# EAGLE board SETBOARD (EAGLE 7.4.0)
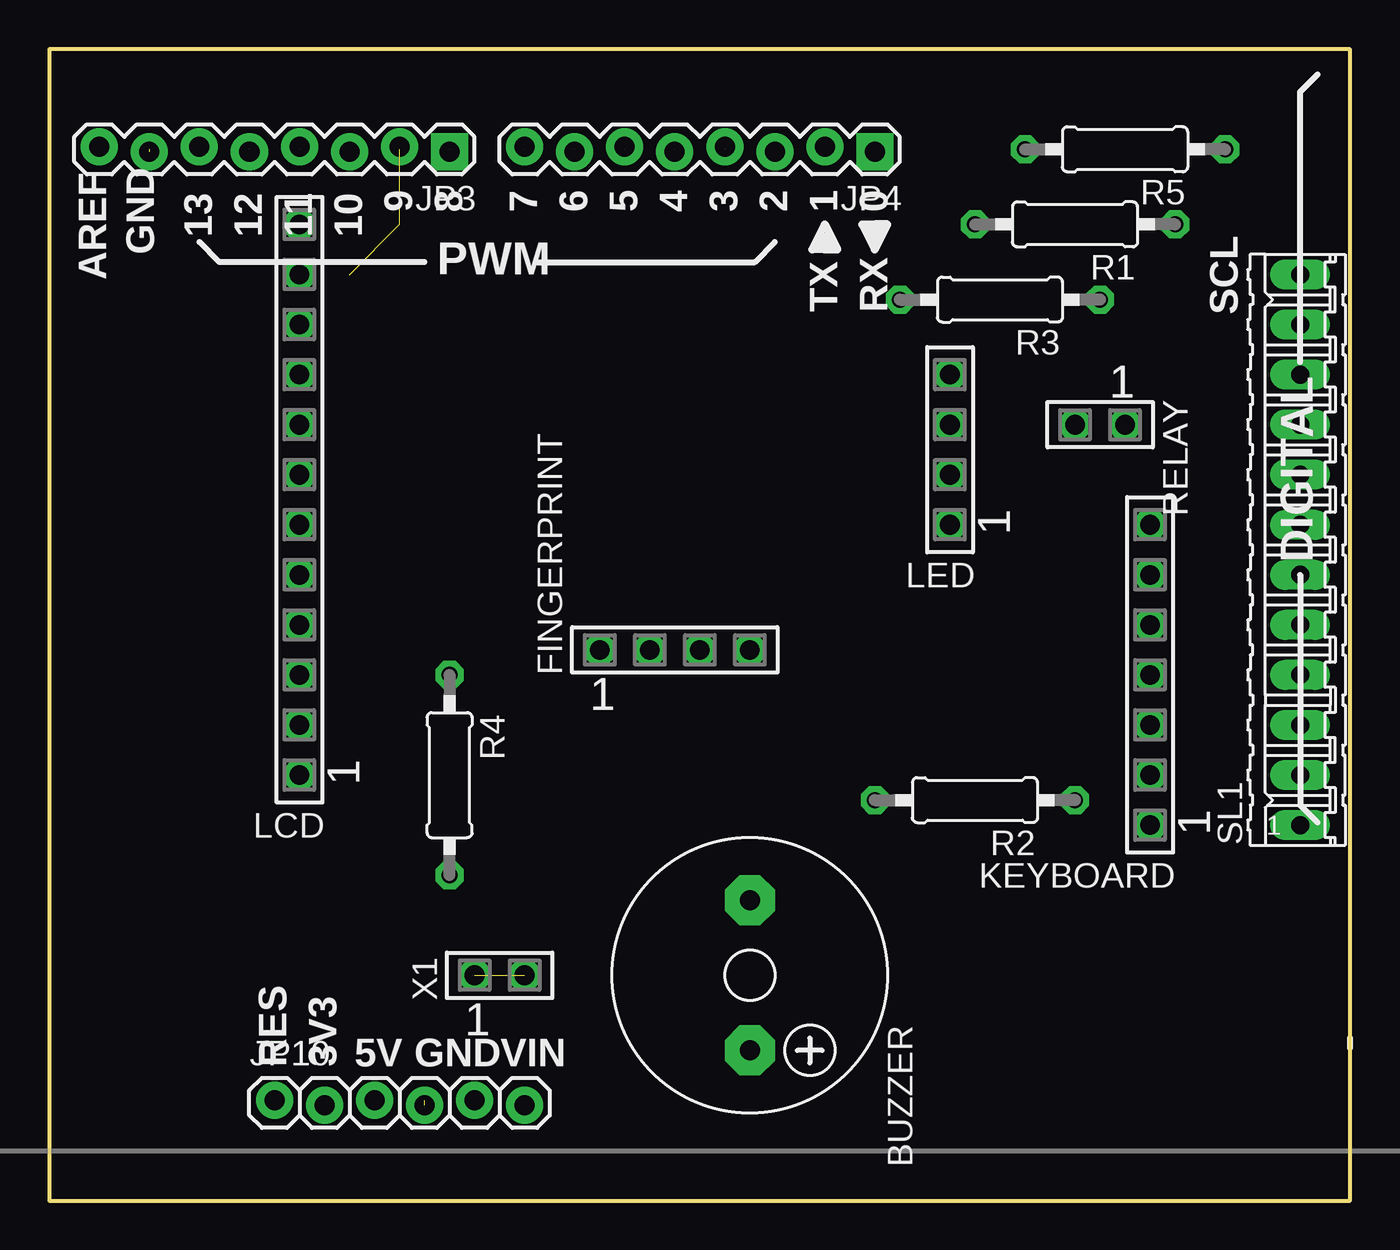
[diagram p0: board, top side]
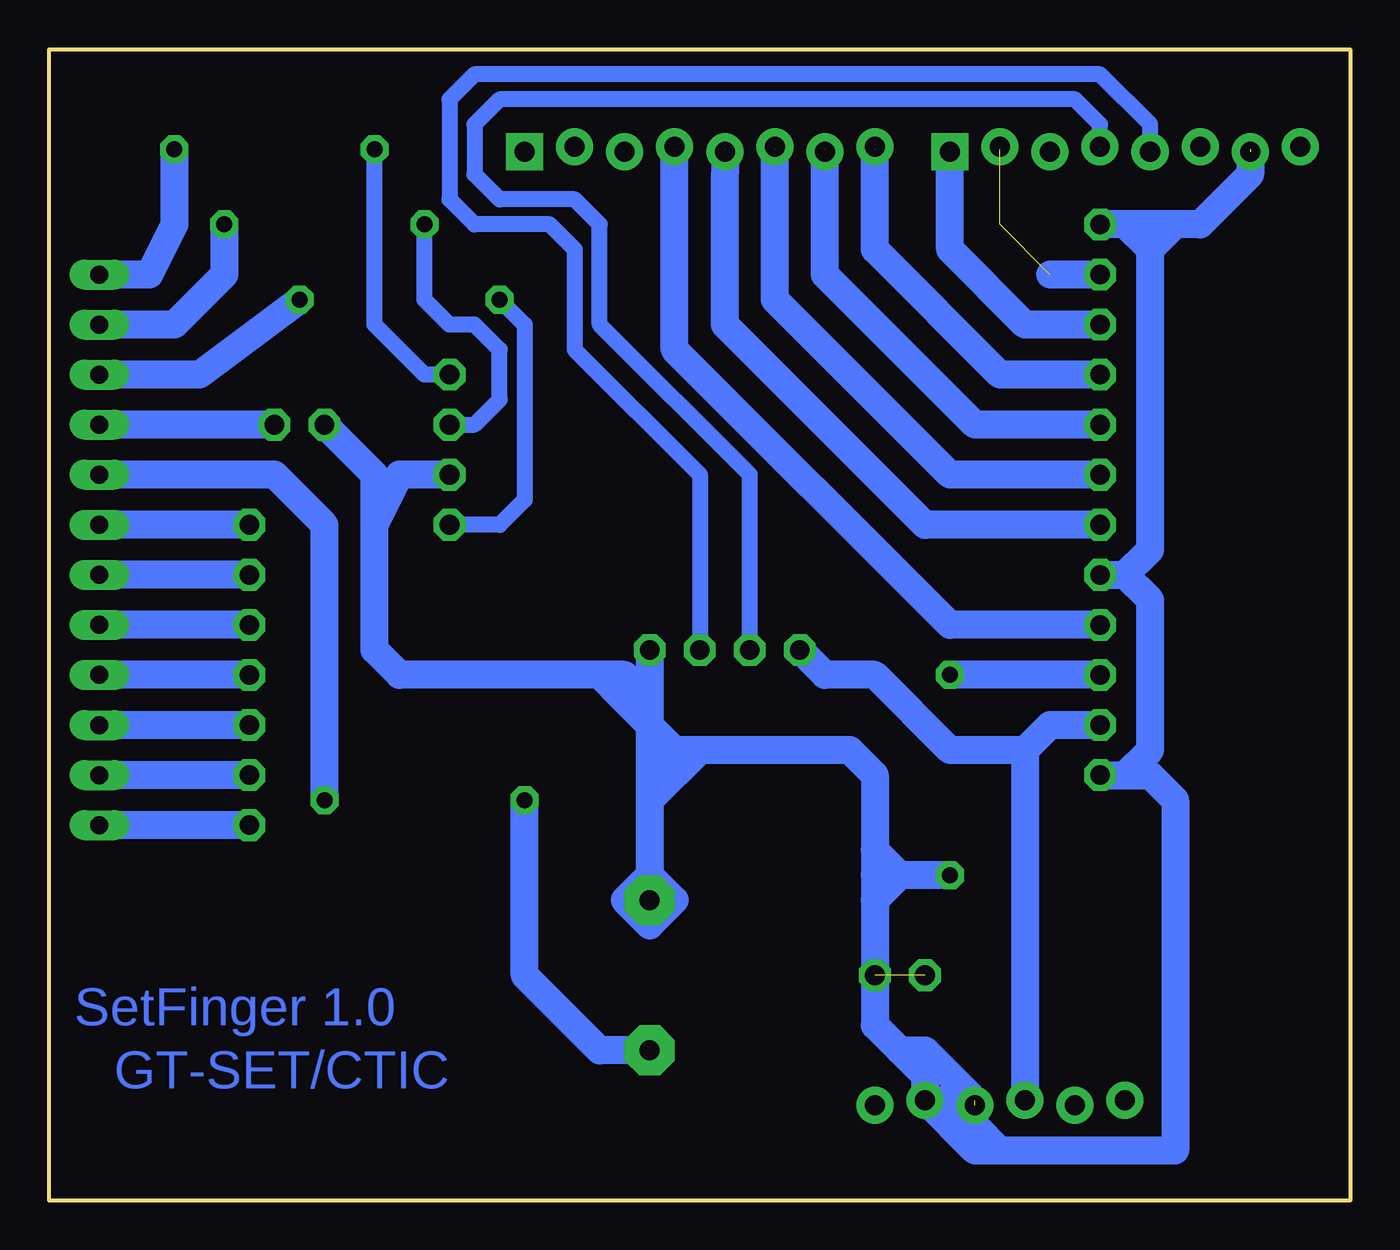
[diagram p1: board, bottom side, seen from below]

Size 66.04 x 58.42 mm. Coordinates in mm from the lower left corner, seen from the top.
Outline: 0,0 66.04,0 66.04,58.42 0,58.42 0,0
Copper layers (1*16): Top 0.035mm / dielectric 1.5mm / Bottom 0.035mm
Design rules "SparkFun": minimum track width 8mil, minimum drill 20mil, track to track 8mil, track to pad 8mil, pad to pad 8mil, via to via 8mil, smd to smd 8mil, copper to edge 10mil, drill to drill 8mil, minimum pad ring 12mil, minimum via ring 10mil, stop-mask expansion 4mil, vias tented up to drill 25mil, thermal gap 10mil

## Footprints (pad centres in the part's own frame; a part is rotated, then mirrored left to right if it is on the bottom)
F/CM12P = drill 1.016 pad 2.54 octagon: + 3.81,0; - -3.81,0
SSW-104-02-S-S = drill 1 pad 1.5 octagon: 1 -3.81,0; 2 -1.27,0; 3 1.27,0; 4 3.81,0
1X08_LOCK = drill 1.016 pad 1.88 square: 1 0,0.127 | drill 1.016 pad 1.88: 2 2.54,-0.127; 3 5.08,0.127; 4 7.62,-0.127; 5 10.16,0.127; 6 12.7,-0.127; 7 15.24,0.127; 8 17.78,-0.127
1X06_LOCK = drill 1.016 pad 1.88: 1 0,0; 2 2.54,-0.254; 3 5.08,0; 4 7.62,-0.254; 5 10.16,0; 6 12.7,-0.254
SSW-107-02-S-S = drill 1 pad 1.5 octagon: 1 -7.62,0; 2 -5.08,0; 3 -2.54,0; 4 0,0; 5 2.54,0; 6 5.08,0; 7 7.62,0
SSW-112-02-S-S = drill 1 pad 1.5 octagon: 1 -13.97,0; 2 -11.43,0; 3 -8.89,0; 4 -6.35,0; 5 -3.81,0; 6 -1.27,0; 7 1.27,0; 8 3.81,0; 9 6.35,0; 10 8.89,0; 11 11.43,0; 12 13.97,0
0207/10 = drill 0.813 octagon: 1 -5.08,0; 2 5.08,0
SSW-102-02-S-S = drill 1 pad 1.5 octagon: 1 -1.27,0; 2 1.27,0
12P = drill 0.914 long: 1 -13.97,0; 2 -11.43,0; 3 -8.89,0; 4 -6.35,0; 5 -3.81,0; 6 -1.27,0; 7 1.27,0; 8 3.81,0; 9 6.35,0; 10 8.89,0; 11 11.43,0; 12 13.97,0

## Placement (x,y rotation side)
BUZZER  BUZZER  [F/CM12P]  35.56,11.43 270 top
FINGERPRINT  BIOMETRIC  [SSW-104-02-S-S]  31.75,27.94 0 top
JP3  [1X08_LOCK]  20.32,53.34 180 top
JP4  [1X08_LOCK]  41.91,53.34 180 top
JP10  [1X06_LOCK]  11.43,5.08 0 top
KEYBOARD  KEYBOARD  [SSW-107-02-S-S]  55.88,26.67 90 top
LCD  LCD  [SSW-112-02-S-S]  12.7,35.56 90 top
LED  LED RGB  [SSW-104-02-S-S]  45.72,38.1 90 top
R1  [0207/10]  52.07,49.53 180 top
R2  [0207/10]  46.99,20.32 180 top
R3  [0207/10]  48.26,45.72 180 top
R4  [0207/10]  20.32,21.59 270 top
R5  [0207/10]  54.61,53.34 180 top
RELAY  RELAY  [SSW-102-02-S-S]  53.34,39.37 180 top
SL1  [12P]  63.5,33.02 90 top
U$2  CREATIVE_COMMONS  [CREATIVE_COMMONS]  -35.56,-12.7 0 top  (outside the outline)
X1  SSW-102-02-S-S  [SSW-102-02-S-S]  22.86,11.43 0 top

## Library data of the parts
BUZZER = buzzer; OC_FARNELL: unknown; OC_NEWARK: unknown
FINGERPRINT LED = con-samtec; MPN: SSW-104-02-S-S; OC_FARNELL: unknown; OC_NEWARK: 11P9384
JP3 JP4 JP10 U$2 = SparkFun
KEYBOARD = con-samtec; MPN: SSW-107-02-S-S; OC_FARNELL: unknown; OC_NEWARK: 11P9433
LCD = con-samtec; MPN: SSW-112-02-S-S; OC_FARNELL: unknown; OC_NEWARK: 11P9515
R1-R5 = eagle-ltspice; SPICEMODEL: NONE; SPICEPREFIX: R
RELAY X1 = con-samtec; MPN: SSW-102-02-S-S; OC_FARNELL: unknown; OC_NEWARK: 11P9351
SL1 = con-amp-quick; OC_FARNELL: unknown; OC_NEWARK: unknown

## Nets
3.3: JP10.2
AREF: JP3.8
D2: JP4.3
D3: JP4.4 LCD.4
D4: JP4.5 LCD.6
D5: JP4.6 LCD.7
D6: JP4.7 LCD.8
D7: JP4.8 LCD.9
D8: JP3.1 LCD.10
D9: JP3.2 LCD.11
D10: JP3.3
D13: JP3.6
D22: KEYBOARD.1 SL1.1
D24: KEYBOARD.2 SL1.2
D26: KEYBOARD.3 SL1.3
D28: KEYBOARD.4 SL1.4
D30: KEYBOARD.5 SL1.5
D32: KEYBOARD.6 SL1.6
D34: KEYBOARD.7 SL1.7
D38: RELAY.1 SL1.9
D40: R3.1 SL1.10
D42: R1.1 SL1.11
D44: R5.1 SL1.12
N$1: LCD.3 R4.1
N$2: LED.1 R3.2
N$3: LED.3 R1.2
N$4: LED.4 R5.2
N$5: BUZZER.+ R2.2
N$8: FINGERPRINT.2 JP3.4
N$9: R2.1 SL1.8
N$11: BUZZER.- FINGERPRINT.4 JP3.7 JP10.4 JP10.5 LCD.1 LCD.5 LCD.12 LED.2 R4.2 RELAY.2 X1.1 X1.2
N$12: FINGERPRINT.3 JP3.5
RES: JP10.1
RX0: JP4.1
TX1: JP4.2
VCC: FINGERPRINT.1 JP10.3 LCD.2
VIN: JP10.6

## Tracks (layer width: path | path; a pad name or v marks a point on that pad's centre or on a via)
3.3
  Top 0.203: JP10.2 13.97,5.08 JP10.2
AREF
  Top 0.203: JP3.8 2.54,53.34 JP3.8
D2
  Top 0.203: JP4.3 36.83,53.34
D3  (1 unrouted)
  Top 0.203: JP4.4 34.29,53.34
  Bottom 1.422: LCD.4 20.32,29.21 34.29,43.18 34.29,53.34
D4  (1 unrouted)
  Top 0.203: JP4.5 31.75,53.34
  Bottom 1.422: LCD.6 21.59,34.29 31.75,44.45 31.75,50.8 31.75,52.07 31.75,53.34
D5  (1 unrouted)
  Top 0.203: JP4.6 29.21,53.34
  Bottom 1.422: LCD.7 20.32,36.83 29.21,45.72 29.21,53.34
D6  (1 unrouted)
  Top 0.203: JP4.7 26.67,53.34
  Bottom 1.422: LCD.8 19.05,39.37 26.67,46.99 26.67,53.34
D7  (1 unrouted)
  Top 0.203: JP4.8 24.13,53.34
  Bottom 1.422: LCD.9 17.78,41.91 24.13,48.26 24.13,53.34
D8  (1 unrouted)
  Top 0.203: JP3.1 20.32,53.34
  Bottom 1.422: LCD.10 16.51,44.45 20.32,48.26 20.32,53.34
D9  (3 unrouted)
  Top 0.203: JP3.2 17.78,53.34
  Bottom 1.422: LCD.11 15.24,46.99
D10
  Top 0.203: JP3.3 15.24,53.34
D22
  Bottom 1.422: KEYBOARD.1 SL1.1
D24
  Bottom 1.422: KEYBOARD.2 SL1.2
D26
  Bottom 1.422: KEYBOARD.3 SL1.3
D28
  Bottom 1.422: KEYBOARD.4 SL1.4
D30
  Bottom 1.422: KEYBOARD.5 SL1.5
D32
  Bottom 1.422: KEYBOARD.6 SL1.6
D34
  Bottom 1.422: KEYBOARD.7 SL1.7
D38
  Bottom 1.422: RELAY.1 SL1.9
D40
  Bottom 1.422: R3.1 58.42,41.91 SL1.10
D42
  Bottom 1.422: R1.1 57.15,46.99 59.69,44.45 SL1.11
D44
  Bottom 1.422: R5.1 59.69,49.53 60.96,46.99 SL1.12
N$1
  Bottom 1.422: LCD.3 R4.1
N$2
  Bottom 0.813: R3.2 41.91,44.45 41.91,35.56 43.18,34.29 LED.1
N$3
  Bottom 0.813: LED.3 44.45,39.37 43.18,40.64 43.18,43.18 44.45,44.45 45.72,44.45 46.99,45.72 R1.2
N$4
  Bottom 0.813: LED.4 46.99,41.91 49.53,44.45 R5.2
N$5
  Bottom 1.422: BUZZER.+ 38.1,7.62 41.91,11.43 R2.2
N$8  (1 unrouted)
  Top 0.203: JP3.4 12.7,53.34
  Bottom 0.813: 12.7,53.34 12.7,54.61 13.97,55.88 43.18,55.88 44.45,54.61 44.45,52.07 43.18,50.8 39.37,50.8 38.1,49.53 38.1,44.45 30.48,36.83 FINGERPRINT.2
N$9
  Bottom 1.422: R2.1 52.07,34.29 54.61,36.83 SL1.8
N$11  (3 unrouted)
  Bottom 1.422: 5.08,53.34 5.08,52.07 7.62,49.53 8.89,49.53 | 17.78,2.54 19.05,3.81 19.05,5.08 | 22.86,7.62 24.13,8.89 X1.2 24.13,15.24 | 22.86,7.62 21.59,7.62 | 21.59,7.62 21.59,6.35 | 19.05,5.08 JP10.5 | 21.59,6.35 22.86,7.62 | 19.05,5.08 21.59,7.62 | JP10.5 19.05,2.54 17.78,2.54 | 21.59,6.35 JP10.5 | 24.13,17.78 24.13,21.59 25.4,22.86 33.02,22.86 | 24.13,17.78 24.13,16.51 | 24.13,16.51 24.13,15.24 | FINGERPRINT.4 35.56,24.13 | 35.56,24.13 35.56,22.86 | 35.56,22.86 35.56,21.59 | 35.56,21.59 35.56,20.32 | 35.56,20.32 35.56,16.51 | 35.56,16.51 BUZZER.- | 35.56,13.97 BUZZER.- | 34.29,15.24 BUZZER.- | 36.83,15.24 35.56,13.97 | 35.56,13.97 34.29,15.24 | LED.2 48.26,36.83 | 49.53,34.29 49.53,27.94 48.26,26.67 38.1,26.67 | 49.53,34.29 49.53,35.56 | 49.53,35.56 48.26,36.83 | 48.26,36.83 49.53,34.29 | 49.53,35.56 49.53,36.83 RELAY.2 | R4.2 22.86,16.51 | 22.86,16.51 24.13,16.51 | 22.86,16.51 24.13,17.78 | 22.86,16.51 24.13,15.24 | LCD.1 11.43,21.59 | 11.43,21.59 10.16,21.59 8.89,20.32 8.89,2.54 17.78,2.54 | 11.43,21.59 10.16,22.86 10.16,30.48 11.43,31.75 | LCD.5 11.43,31.75 | 11.43,31.75 10.16,33.02 10.16,48.26 | 10.16,48.26 11.43,49.53 | 11.43,49.53 LCD.12 | 8.89,49.53 11.43,49.53 | 8.89,49.53 10.16,48.26 | BUZZER.- 36.83,15.24 | 35.56,16.51 36.83,15.24 | 35.56,24.13 36.83,25.4 | 36.83,25.4 38.1,26.67 | 33.02,22.86 35.56,20.32 | 34.29,15.24 35.56,16.51 | 34.29,22.86 35.56,21.59 | 33.02,22.86 34.29,22.86 | 34.29,22.86 35.56,22.86 | 38.1,26.67 36.83,26.67 36.83,25.4 | 34.29,22.86 35.56,24.13
  pour Top (isolate 0.305): 77.47,2.54 77.47,3.81 80.01,6.35
N$12  (1 unrouted)
  Top 0.203: JP3.5 10.16,53.34
  Bottom 0.813: 10.16,53.34 10.16,54.61 12.7,57.15 44.45,57.15 45.72,55.88 45.72,50.8 44.45,49.53 40.64,49.53 39.37,48.26 39.37,43.18 33.02,36.83 FINGERPRINT.3
RX0
  Top 0.203: JP4.1 41.91,53.34
TX1
  Top 0.203: JP4.2 39.37,53.34
VCC
  Bottom 1.422: LCD.2 15.24,24.13 16.51,22.86 | 16.51,22.86 JP10.3 | 16.51,22.86 20.32,22.86 24.13,26.67 26.67,26.67 FINGERPRINT.1
VIN
  Top 0.203: JP10.6 24.13,5.08 JP10.6

## Text on the board
Bottom: SetFinger 1.0 | GT-SET/CTIC
tPlace: 9 | 8 | 7 | 6 | 5 | 4 | 3 | 2 | 1 | 0 | 13 | 12 | 11 | 10 | GND | AREF | PWM | TX | RX | SCL | DIGITAL | RES | 3V3 | 5V | GND | VIN
tOrigins: led- -> gnd | led+ -> 5v | DB7 -> 8 | DB6 -> 7 | DB5 -> 6 | DB4 -> 5 | E -> 4 | R/W -> gnd | VCC | RX | TX | GND | RS -> 3 | V0~>gnd | vcc -> vcc | gnd -> gnd